# EAGLE board xytheta (EAGLE 9.6.2)
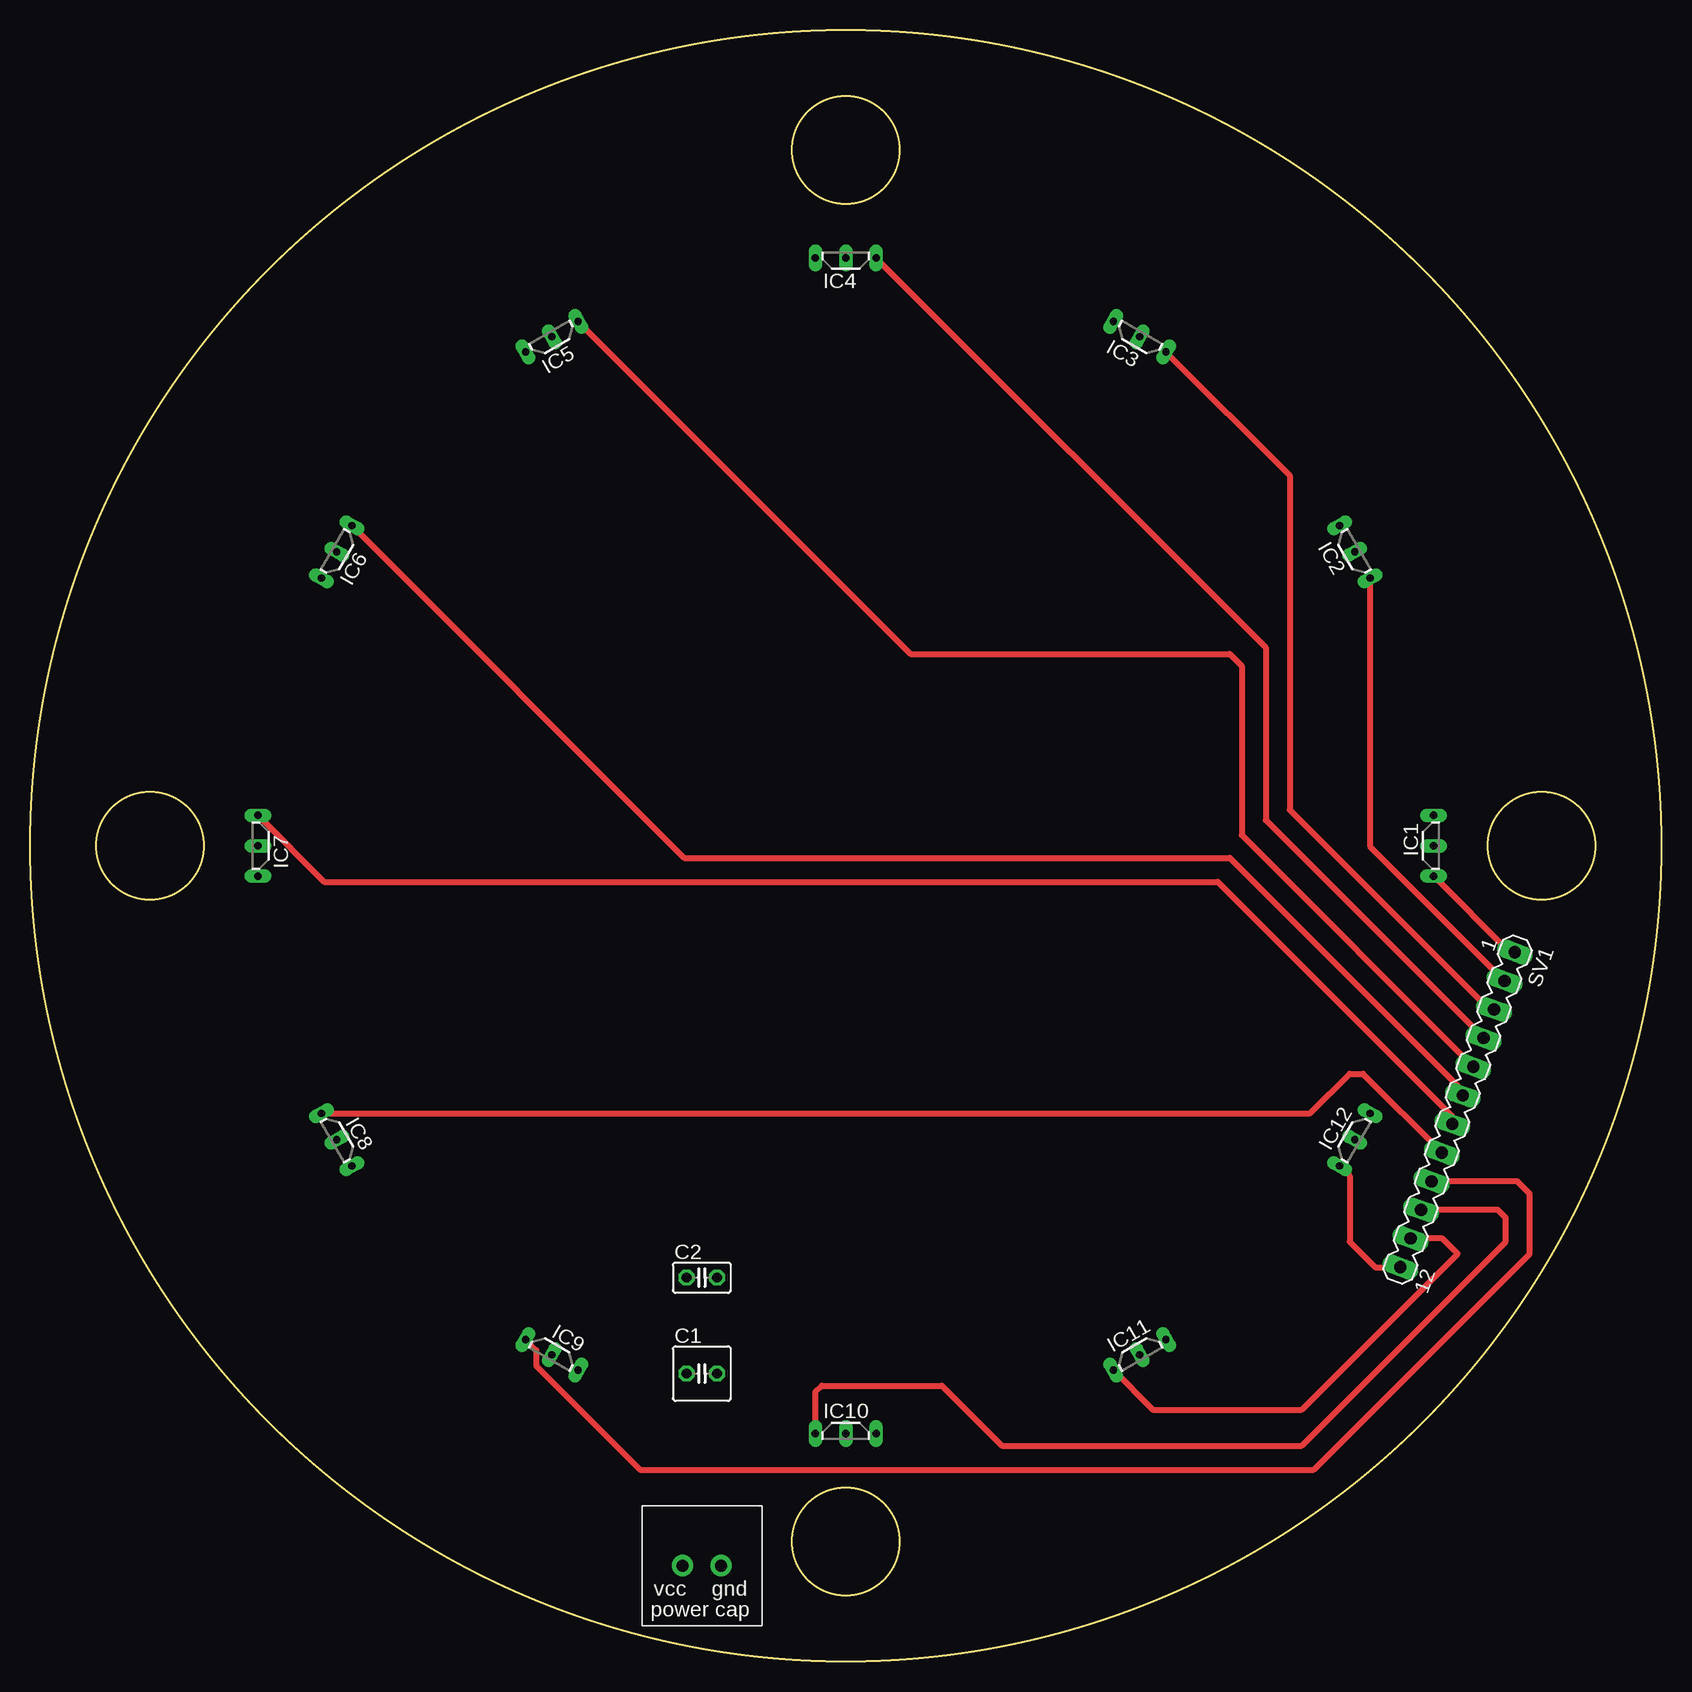
[diagram p0: board, top side]
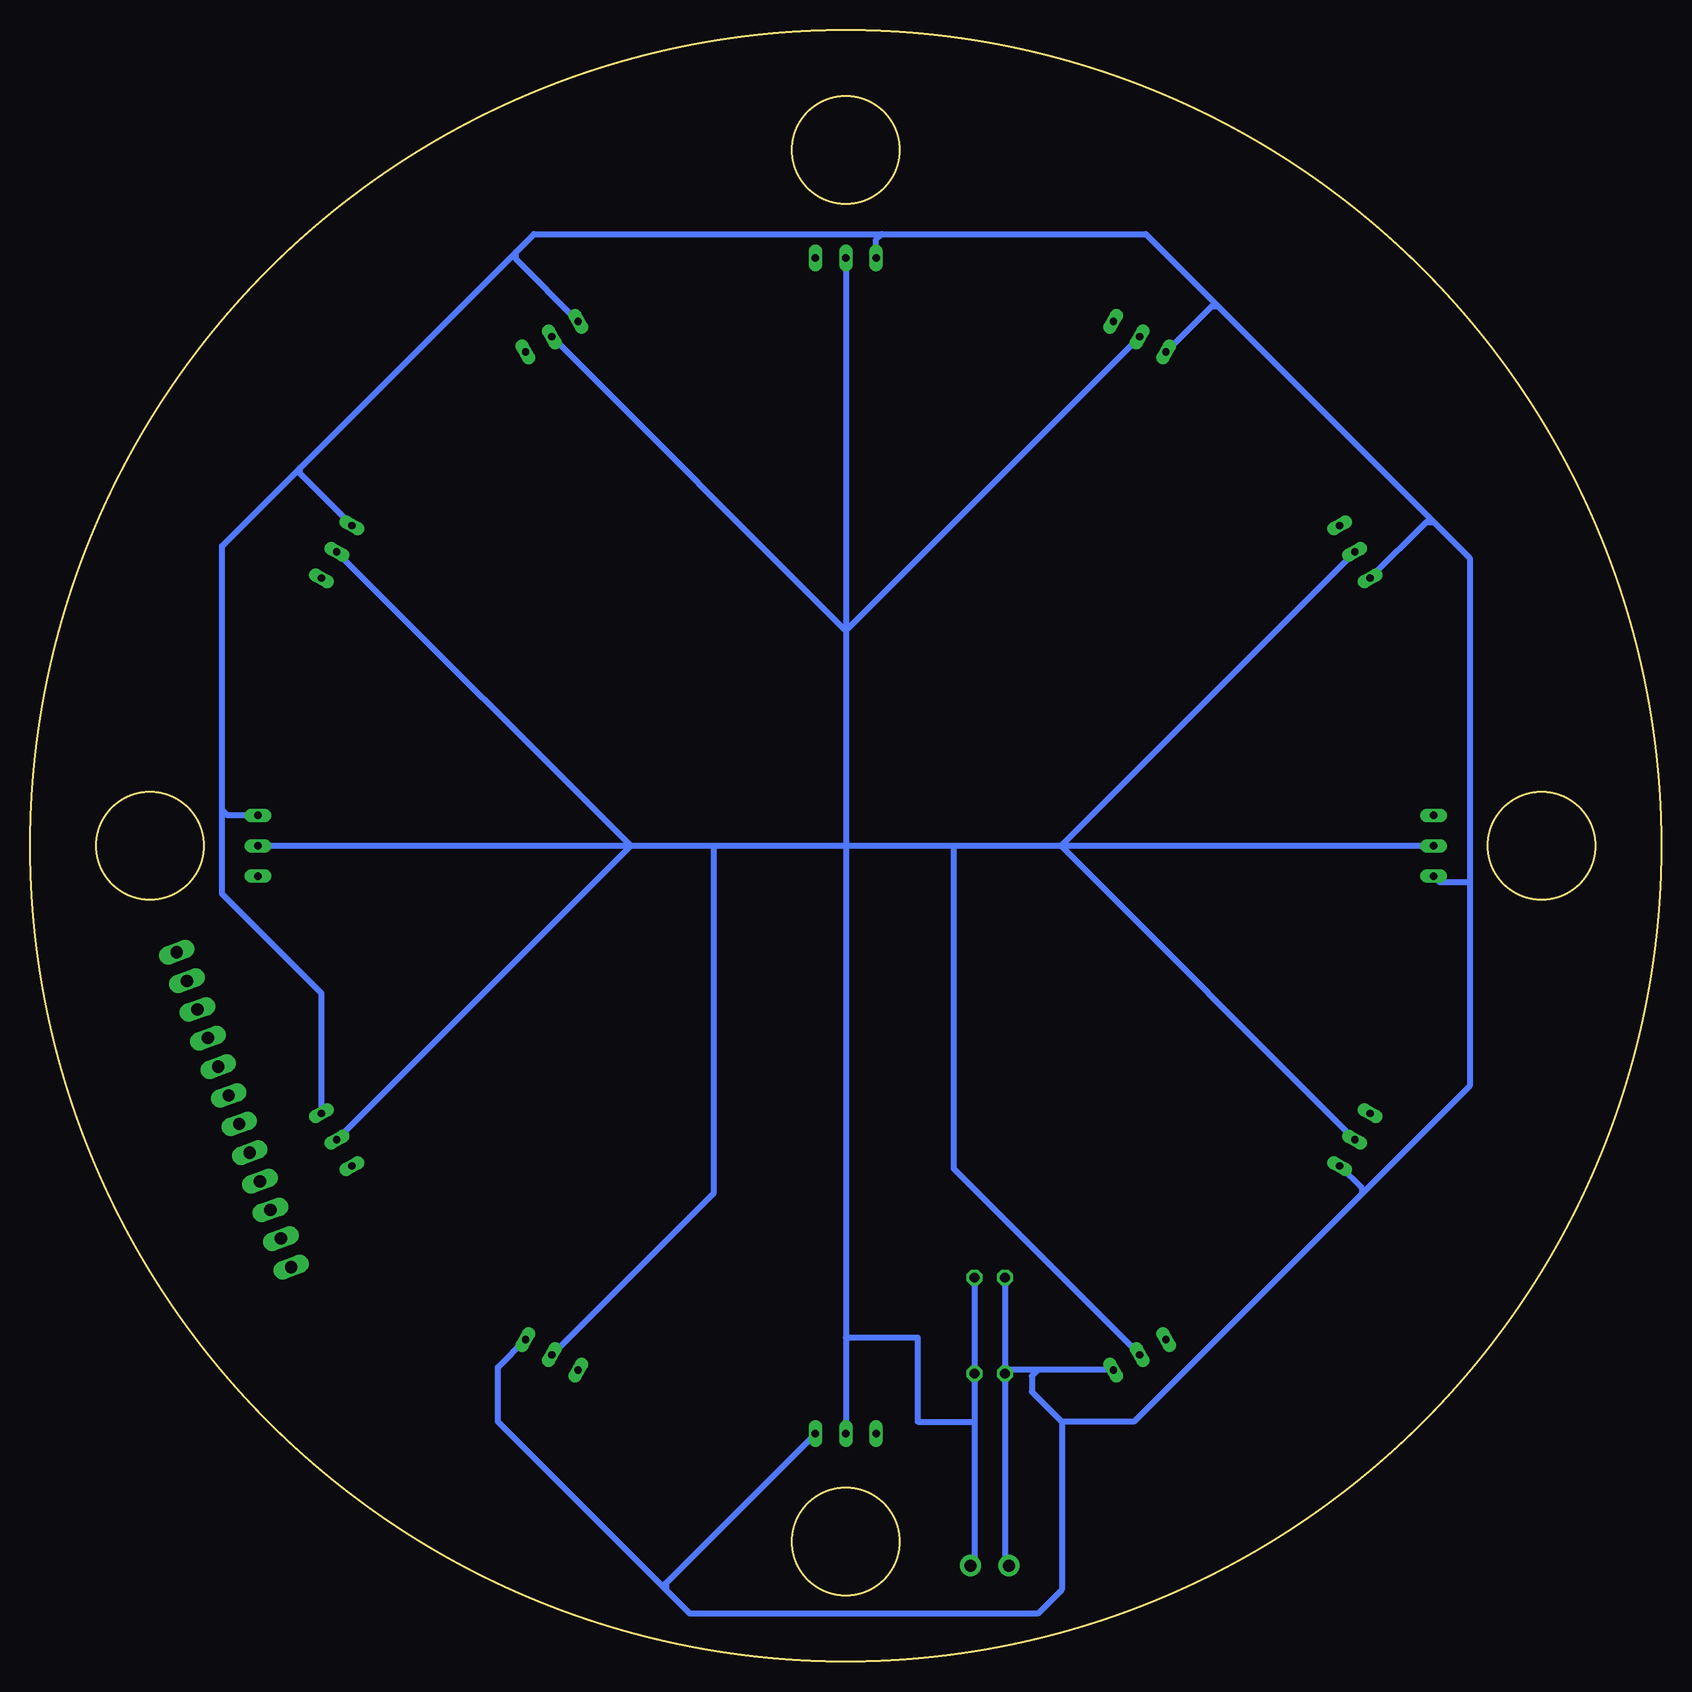
[diagram p1: board, bottom side, seen from below]

Size 136 x 136 mm. Coordinates in mm from the lower left corner, seen from the top.
Outline: circle at 126,68 radius 4.5
Outline: circle at 68,126 radius 4.5
Outline: circle at 10,68 radius 4.5
Outline: circle at 68,10 radius 4.5
Outline: circle at 68,68 radius 68
Copper layers (1*16): Top 0.035mm / dielectric 1.5mm / Bottom 0.035mm
Design rules "default": minimum track width 6mil, minimum drill 0.35mm, track to track 6mil, track to pad 6mil, pad to pad 6mil, via to via 6mil, smd to smd 6mil, copper to edge 40mil, drill to drill 6mil, minimum pad ring 10mil, minimum via ring 8mil, stop-mask expansion 4mil, vias tented up to drill 0mil, thermal gap 10mil

## Footprints (pad centres in the part's own frame; a part is rotated, then mirrored left to right if it is on the bottom)
C025-050X050 = drill 0.813 octagon: 1 -1.27,0; 2 1.27,0
C025-025X050 = drill 0.813 octagon: 1 -1.27,0; 2 1.27,0
SIP3-UA = drill 0.6 pad 0.7 long: 1 -2.54,0; 2 0,0; 3 2.54,0
MA12-1 = drill 1.016 long: 1 -13.97,0; 2 -11.43,0; 3 -8.89,0; 4 -6.35,0; 5 -3.81,0; 6 -1.27,0; 7 1.27,0; 8 3.81,0; 9 6.35,0; 10 8.89,0; 11 11.43,0; 12 13.97,0
POWERCAP = drill 1 pad 1.778: P$1 -1.6,0; P$2 1.6,0

## Placement (x,y rotation side)
C1  [C025-050X050]  56,24 0 top
C2  [C025-025X050]  56,32 0 top
IC1  A1302UA  [SIP3-UA]  117,68 270 top
IC2  A1302UA  [SIP3-UA]  110.44,92.5 300 top
IC3  A1302UA  [SIP3-UA]  92.5,110.44 330 top
IC4  A1302UA  [SIP3-UA]  68,117 0 top
IC5  A1302UA  [SIP3-UA]  43.5,110.44 30 top
IC6  A1302UA  [SIP3-UA]  25.56,92.5 60 top
IC7  A1302UA  [SIP3-UA]  19,68 90 top
IC8  A1302UA  [SIP3-UA]  25.56,43.5 120 top
IC9  A1302UA  [SIP3-UA]  43.5,25.56 150 top
IC10  A1302UA  [SIP3-UA]  68,19 180 top
IC11  A1302UA  [SIP3-UA]  92.5,25.56 210 top
IC12  A1302UA  [SIP3-UA]  110.44,43.5 240 top
SV1  [MA12-1]  119,46 250 top
U$1  POWERCAP  [POWERCAP]  56,8 180 top

## Library data of the parts
C1 C2 = rcl; SPICEPREFIX: C
IC1-IC12 = allegro_custom; MF: ALLEGRO MICROSYSTEMS, INC.; MPN: A1302EUA-T; OC_FARNELL: 1521708; OC_NEWARK: 31K6639
SV1 = con-lstb; OC_FARNELL: unknown; OC_NEWARK: unknown
U$1 = Powercap

## Nets
N$1: IC1.3 SV1.1
N$2: IC2.3 SV1.2
N$3: IC3.3 SV1.3
N$4: IC4.3 SV1.4
N$5: IC5.3 SV1.5
N$6: IC6.3 SV1.6
N$7: IC7.3 SV1.7
N$8: IC8.3 SV1.8
N$9: IC9.3 SV1.9
N$10: IC10.3 SV1.10
N$11: IC11.3 SV1.11
N$12: IC12.3 SV1.12
N$14: C1.1 C2.1 IC1.1 IC2.1 IC3.1 IC4.1 IC5.1 IC6.1 IC7.1 IC8.1 IC9.1 IC10.1 IC11.1 IC12.1 U$1.P$2
N$15: C1.2 C2.2 IC1.2 IC2.2 IC3.2 IC4.2 IC5.2 IC6.2 IC7.2 IC8.2 IC9.2 IC10.2 IC11.2 IC12.2 U$1.P$1

## Tracks (layer width: path | path; a pad name or v marks a point on that pad's centre or on a via)
N$1
  Top 0.508: IC1.3 123.33,59.13 SV1.1
N$2
  Top 0.508: IC2.3 111.7,67.94 SV1.2
N$3
  Top 0.508: IC3.3 105,98.86 105,71 121.65,54.35 SV1.3
N$4
  Top 0.508: IC4.3 103,84.54 103,70.14 SV1.4
N$5
  Top 0.508: IC5.3 73.41,84 100,84 101,83 101,68.88 SV1.5
N$6
  Top 0.508: IC6.3 54.53,67 100,67 119.43,47.57 SV1.6
N$7
  Top 0.508: IC7.3 24.54,65 99,65 118.57,45.43 SV1.7
N$8
  Top 0.508: IC8.3 106.7,45.7 110,49 111.12,49 SV1.8
N$9
  Top 0.508: IC9.3 42.19,25.94 42.19,24.66 50.85,16 107,16 125,34 125,39 123.97,40.03 SV1.9
N$10
  Top 0.508: IC10.3 65.46,22.46 66,23 76,23 81,18 106,18 123,35 123,37 122.35,37.65 SV1.10
N$11
  Top 0.508: IC11.3 93.59,21 106,21 119,34 117.74,35.26 SV1.11
N$12
  Top 0.508: IC12.3 110,40.47 110,35 112.13,32.87 SV1.12
N$14
  Bottom 0.508: IC12.1 111.7,55.7 120,64 120,71 | 113.5,99.5 120,93 120,71 | 113.5,99.5 95.5,117.5 | 95.5,117.5 94,119 65,119 | 65,119 43,119 37,113 | 37,113 19,95 | 19,95 16,92 16,65 | 16,65 16,48 25,39 | 50,20 44,20 25,39 | IC9.1 52,24.3 | 52,24.3 54.44,24.3 C1.1 | C2.1 C1.1 | 52,24.3 52.5,23.8 52.5,22.5 50,20 | IC8.1 25,39.47 25,39 | IC7.1 18.54,65 16,65 | IC6.1 19.59,95 19,95 | IC5.1 37.47,113 37,113 | IC4.1 65.46,118.54 65,119 | IC3.1 95.5,116.91 95.5,117.5 | IC2.1 113.5,99.03 113.5,99.5 | IC1.1 119.54,70.54 120,71 | 50,20 50,6 52,4 81,4 83,6 | 83,6 97,20 97,24.53 IC11.1 | IC10.1 83,6.54 83,6 | C1.1 54.73,8.33 U$1.P$2
N$15
  Bottom 0.508: IC7.2 50,68 | IC4.2 68,86 | 68,27 IC10.2 | IC5.2 67.94,86 68,86 | IC6.2 50,68.06 50,68 | IC8.2 50,67.94 50,68 | IC12.2 86,67.94 | C2.2 C1.2 57.27,20 | 57.27,20 62,20 62,27 68,27 | IC2.2 86,68.06 | 86,68.06 86,67.94 | IC3.2 68.06,86 68,86 | 86,67.94 85.94,68 79,68 | 50,68 59,68 | 59,68 68,68 | 68,68 79,68 | 86,68.06 86.06,68 IC1.2 | IC9.2 59,41.06 59,68 | 68,86 68,68 | 68,68 68,27 | IC11.2 79,39.06 79,68 | 57.27,20 57.27,8.33 U$1.P$1